# EAGLE board subscale_deployment (EAGLE 9.2.2)
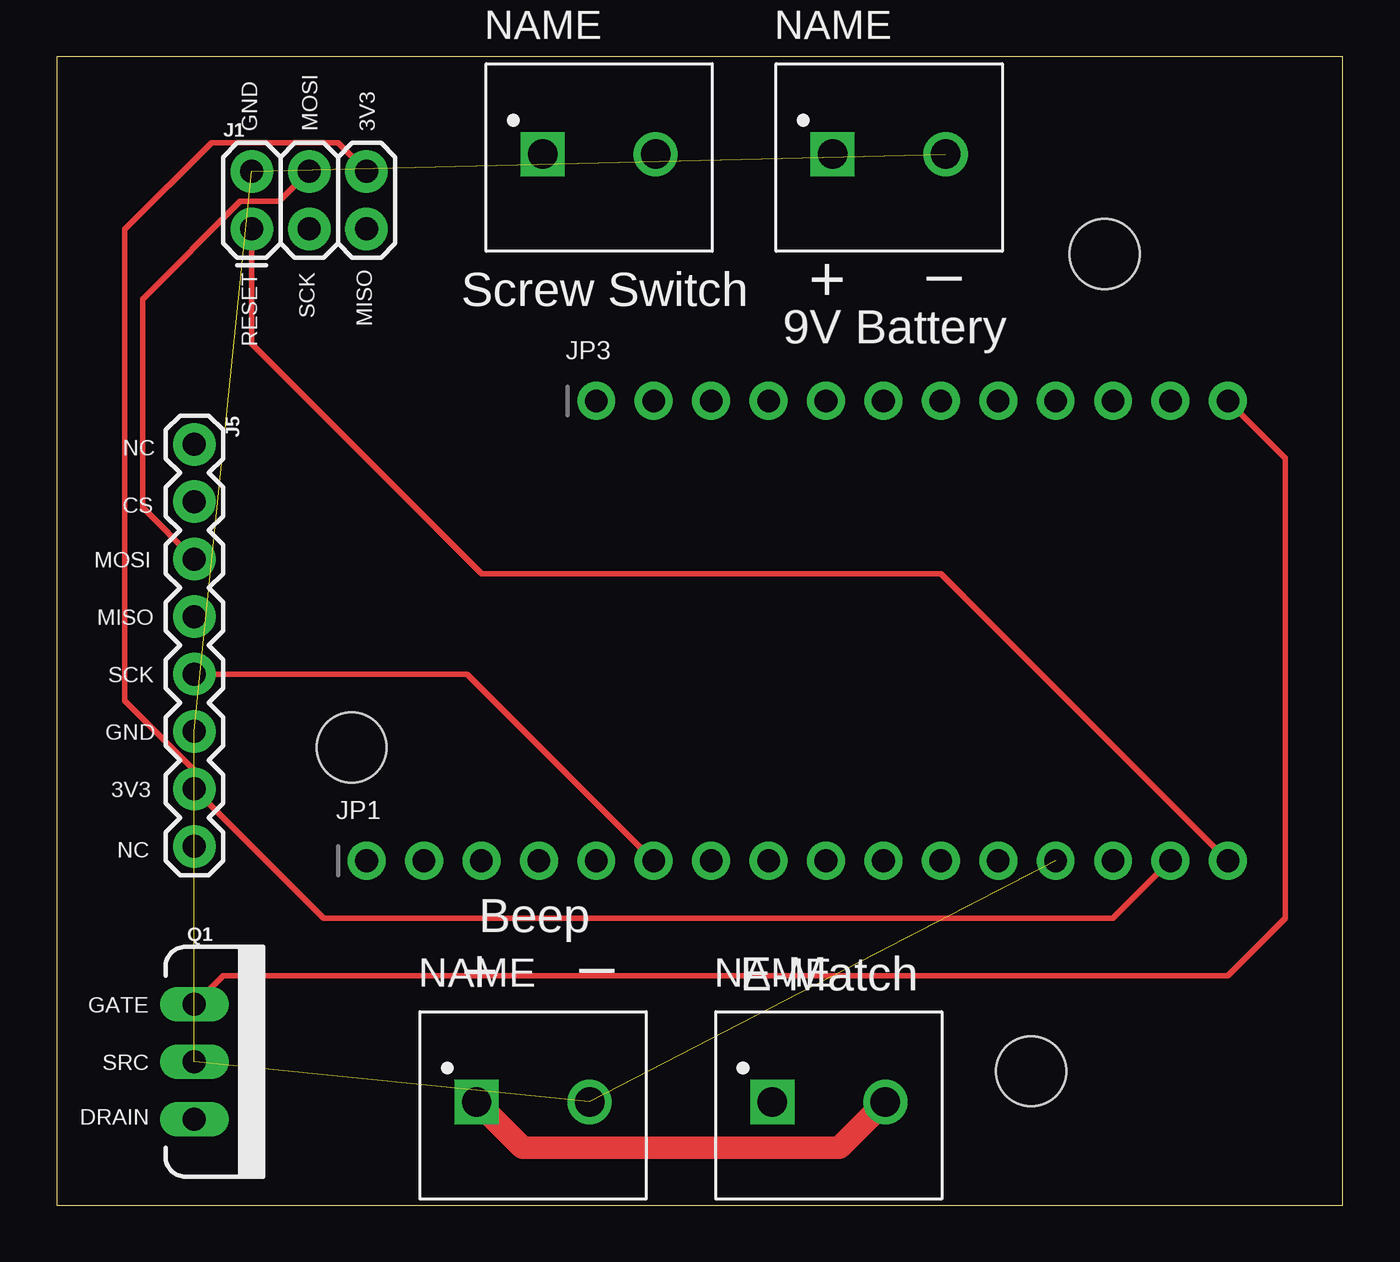
[diagram p0: board, top side]
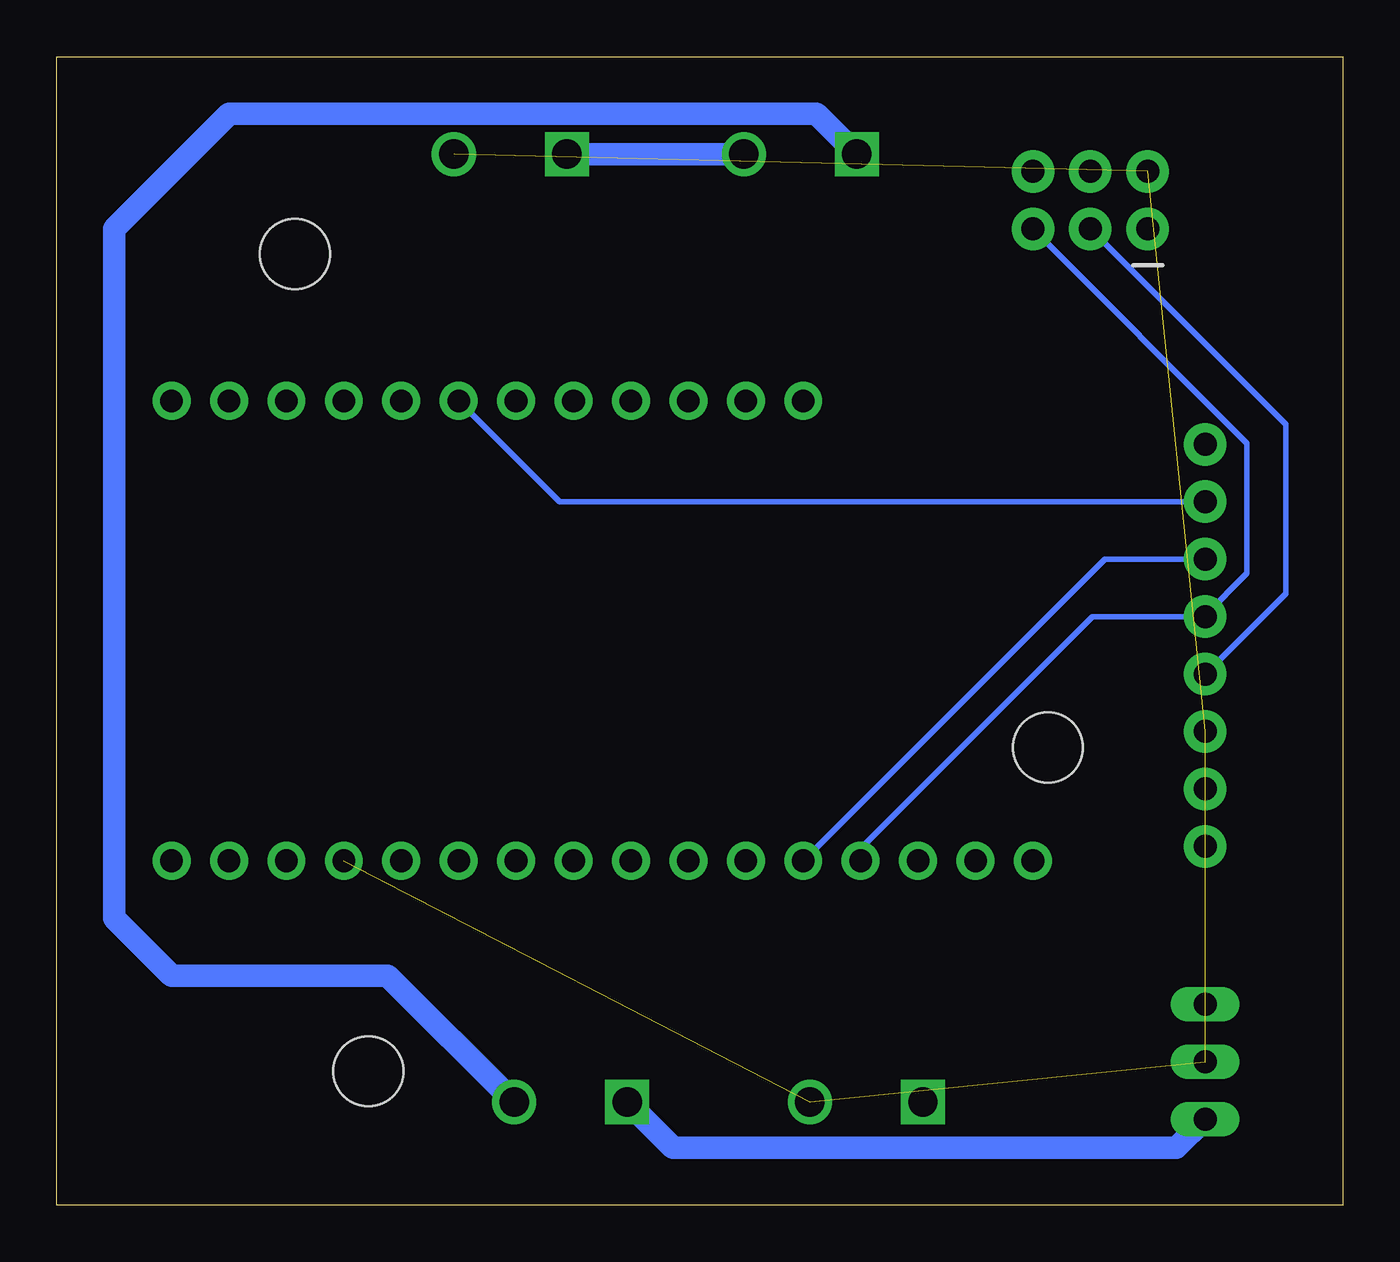
[diagram p1: board, bottom side, seen from below]

Size 56.91 x 50.8 mm. Coordinates in mm from the lower left corner, seen from the top.
Outline: 0,0 56.9,0 56.91,50.8 0,50.8 0,0
Copper layers (1*16): Top 0.035mm / dielectric 1.5mm / Bottom 0.035mm
Design rules "default": minimum track width 6mil, minimum drill 0.35mm, track to track 6mil, track to pad 6mil, pad to pad 6mil, via to via 6mil, smd to smd 6mil, copper to edge 40mil, drill to drill 6mil, minimum pad ring 10mil, minimum via ring 8mil, stop-mask expansion 4mil, vias tented up to drill 0mil, thermal gap 10mil
Holes 3.1 mm at 43.11,5.93 46.37,42.07 13.06,20.25

## Footprints (pad centres in the part's own frame; a part is rotated, then mirrored left to right if it is on the bottom)
PHOENIX_1935161 = drill 1.3 square: 1 -2.5,0 | drill 1.3: 2 2.5,0
2X3 = drill 1.016 pad 1.88: 1 0,0; 2 0,2.54; 3 2.54,0; 4 2.54,2.54; 5 5.08,0; 6 5.08,2.54
1X08 = drill 1.016 pad 1.88: 1 0,0; 2 2.54,0; 3 5.08,0; 4 7.62,0; 5 10.16,0; 6 12.7,0; 7 15.24,0; 8 17.78,0
1X16_ROUND = drill 1 pad 1.676: 1 -19.05,0; 2 -16.51,0; 3 -13.97,0; 4 -11.43,0; 5 -8.89,0; 6 -6.35,0; 7 -3.81,0; 8 -1.27,0; 9 1.27,0; 10 3.81,0; 11 6.35,0; 12 8.89,0; 13 11.43,0; 14 13.97,0; 15 16.51,0; 16 19.05,0
1X12_ROUND = drill 1 pad 1.676: 1 -13.97,0; 2 -11.43,0; 3 -8.89,0; 4 -6.35,0; 5 -3.81,0; 6 -1.27,0; 7 1.27,0; 8 3.81,0; 9 6.35,0; 10 8.89,0; 11 11.43,0; 12 13.97,0
TO220V = drill 1.016 long: 1 -2.54,0; 2 0,0; 3 2.54,0

## Placement (x,y rotation side)
9V_BATT  9V battery  [PHOENIX_1935161]  36.83,46.48 0 top
BUZZER  [PHOENIX_1935161]  21.08,4.57 0 top
E-MATCH  [PHOENIX_1935161]  34.16,4.57 0 top
J1  FEMALE 2x3  [2X3]  8.64,43.18 0 top
J5  [1X08]  6.1,33.66 270 top
JP1  [1X16_ROUND]  32.77,15.24 0 top
JP3  [1X12_ROUND]  37.85,35.57 0 top
Q1  100V 14A  [TO220V]  6.1,6.35 270 top
SCREW_SWITCH  [PHOENIX_1935161]  24,46.48 0 top

## Library data of the parts
9V_BATT BUZZER E-MATCH SCREW_SWITCH = 1935161; DESCRIPTION: Conn Terminal Blocks 2 POS 5mm Solder ST Thru-Hole 16A; DIGI-KEY_PART_NUMBER: 277-1667-ND; DIGI-KEY_PURCHASE_URL: https://www.digikey.com/product-detail/en/phoenix-contact/1935161/277-1667-ND/568614?utm_source=snapeda&utm_medium=aggregator&utm_campaign=symbol; MF: Phoenix Contact; MP: 1935161; PACKAGE: None
J1 = SparkFun-Connectors; PROD_ID: CONN-11566
J5 = SparkFun-Connectors; PROD_ID: CONN-08438
JP1 JP3 = microbuilder
Q1 = SparkFun-DiscreteSemi; PROD_ID: TRANS-10060

## Nets
0: JP1.3
1: JP1.2
2: JP3.12 Q1.1
3: JP3.11
5: JP3.10
6: JP3.9
9: JP3.8
9V: BUZZER.1 E-MATCH.2 SCREW_SWITCH.1
10: J5.2 JP3.7
11: JP3.6
12: JP3.5
13: JP3.4
+3V3: J1.6 J5.7 JP1.15
A0: JP1.12
A1: JP1.11
A2: JP1.10
A3: JP1.9
A4: JP1.8
A5: JP1.7
AREF: JP1.14
BATT+: 9V_BATT.1 SCREW_SWITCH.2
DIO1: JP1.1
EN: JP3.2
GND: 9V_BATT.2 BUZZER.2 J1.2 J5.6 JP1.13 Q1.2
MISO: J1.5 J5.4 JP1.4
MOSI: J1.4 J5.3 JP1.5
N$1: E-MATCH.1 Q1.3
RST: J1.1 JP1.16
SCK: J1.3 J5.5 JP1.6
VBAT: JP3.1
VBUS: JP3.3

## Tracks (layer width: path | path; a pad name or v marks a point on that pad's centre or on a via)
2
  Top 0.25: Q1.1 7.37,10.16 51.82,10.16 54.36,12.7 54.36,33.03 JP3.12
9V
  Top 1: BUZZER.1 20.61,2.54 34.63,2.54 E-MATCH.2
  Bottom 1: E-MATCH.2 42.25,10.16 51.82,10.16 54.36,12.7 54.36,43.18 49.28,48.26 23.28,48.26 SCREW_SWITCH.1
10
  Bottom 0.25: J5.2 34.66,31.11 JP3.7
+3V3
  Top 0.25: JP1.15 46.74,12.7 11.81,12.7 J5.7 6.1,19.23 3.03,22.3 3.03,43.16 6.86,46.99 12.45,46.99 J1.6
BATT+
  Bottom 1: 9V_BATT.1 SCREW_SWITCH.2
GND  (5 unrouted)
MISO
  Bottom 0.25: JP1.4 21.34,15.78 11.08,26.04 J5.4 6.1,26.09 4.24,27.94 4.24,33.71 J1.5
MOSI
  Top 0.25: J5.3 3.81,30.86 3.81,40.08 8.13,44.4 9.85,44.4 J1.4
  Bottom 0.25: JP1.5 10.54,28.57 J5.3
N$1
  Bottom 1: Q1.3 7.37,2.54 29.63,2.54 E-MATCH.1
RST
  Top 0.25: JP1.16 39.12,27.94 18.8,27.94 8.64,38.1 J1.1
SCK
  Top 0.25: JP1.6 18.16,23.5 J5.5
  Bottom 0.25: J1.3 2.54,34.54 2.54,27.05 J5.5

## Text on the board
tPlace: GND | MOSI | 3V3 | Screw Switch | + | – | SCK | MISO | RESET | 9V Battery | NC | CS | MOSI | MISO | SCK | GND | 3V3 | NC | Beep | – | GATE | + | E-Match | SRC | DRAIN